# EAGLE board psg-basic-x4 (EAGLE 6.6.0)
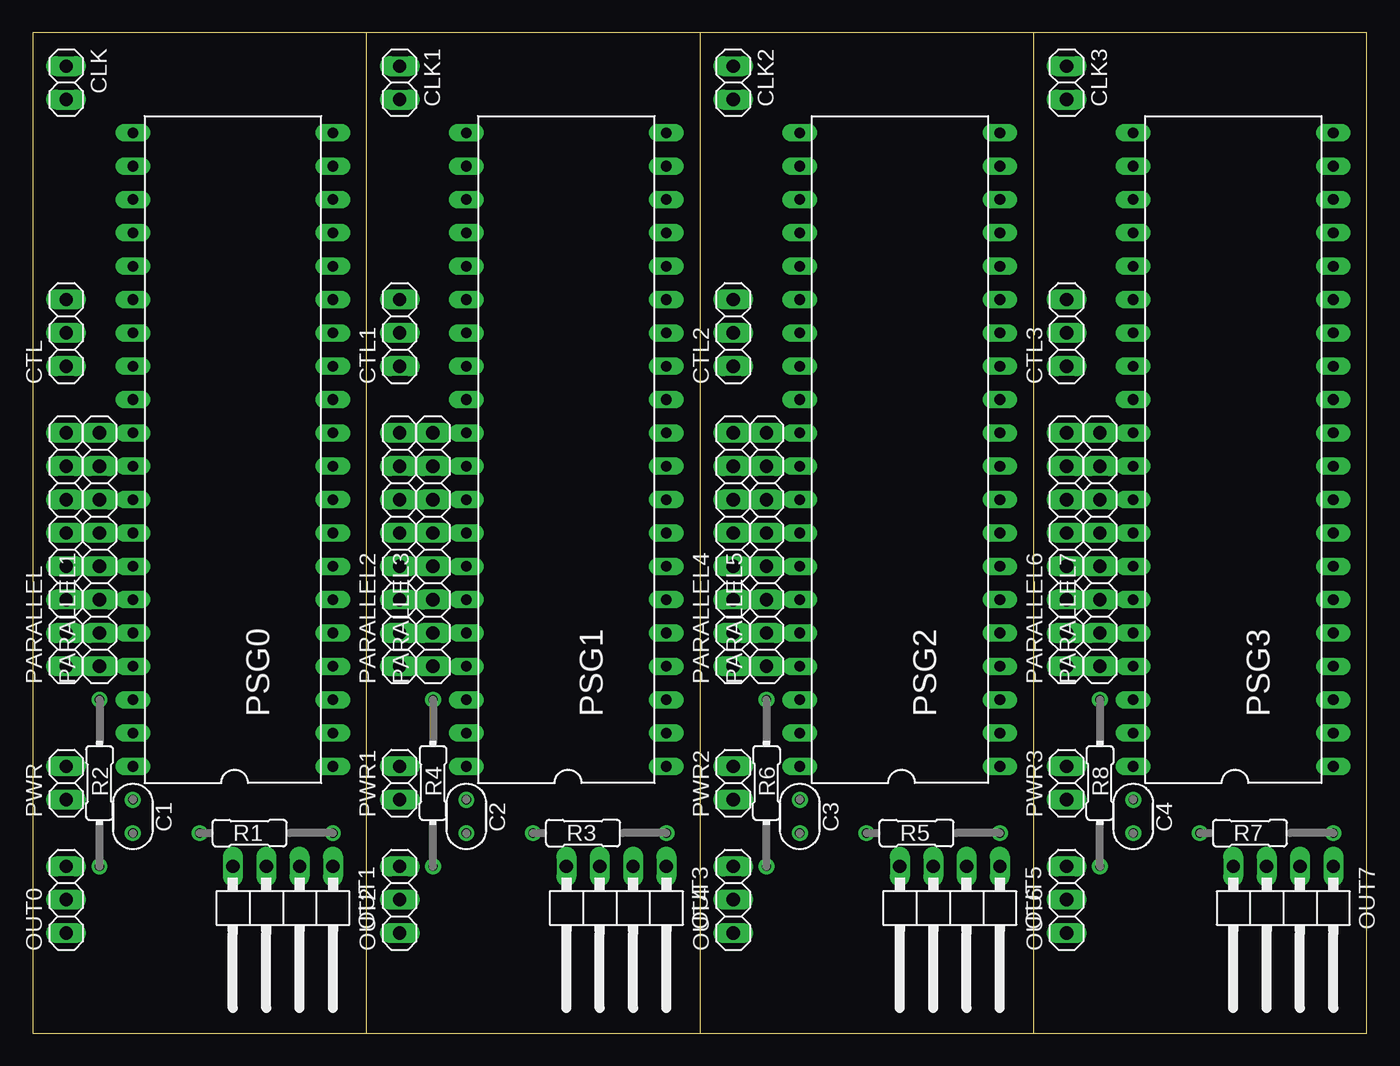
[diagram p0: board, top side]
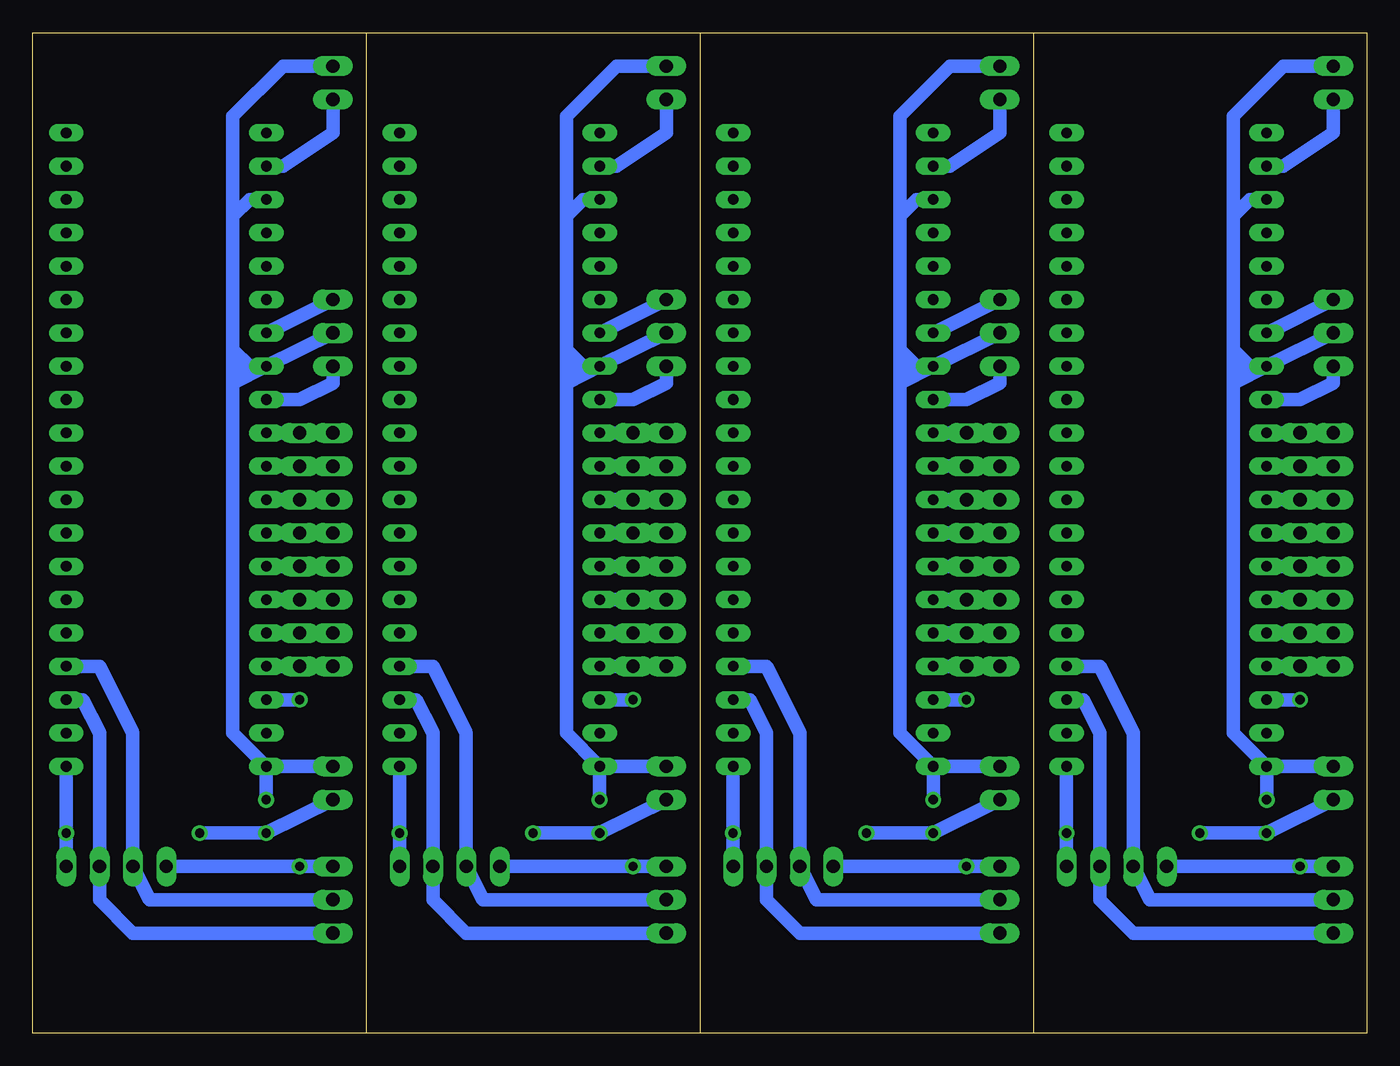
[diagram p1: board, bottom side, seen from below]

Size 101.6 x 76.2 mm. Coordinates in mm from the lower left corner, seen from the top.
Outline: 25.4,0 0,0 0,76.2 25.4,76.2
Outline: 25.4,0 50.8,0
Outline: 50.8,0 76.2,0
Outline: 76.2,0 101.6,0 101.6,76.2 76.2,76.2
Outline: 76.2,76.2 50.8,76.2
Outline: 50.8,76.2 25.4,76.2
Outline: 25.4,76.2 25.4,0
Outline: 50.8,76.2 50.8,0
Outline: 76.2,76.2 76.2,0
Copper layers (1*16): Top 0.035mm / dielectric 1.5mm / Bottom 0.035mm
Design rules "default": minimum track width 10mil, minimum drill 24mil, track to track 8mil, track to pad 8mil, pad to pad 8mil, via to via 8mil, smd to smd 8mil, copper to edge 40mil, drill to drill 8mil, minimum pad ring 10mil, minimum via ring 8mil, stop-mask expansion 4mil, vias tented up to drill 0mil, thermal gap 10mil

## Footprints (pad centres in the part's own frame; a part is rotated, then mirrored left to right if it is on the bottom)
050X030_025 = drill 0.7: 1 -1.27,0; 2 1.27,0
1X02 = drill 1.016 long: 1 -1.27,0; 2 1.27,0
1X03 = drill 1.016 long: 1 -2.54,0; 2 0,0; 3 2.54,0
1X04/90 = drill 1.016 long: 1 -3.81,-3.81; 2 -1.27,-3.81; 3 1.27,-3.81; 4 3.81,-3.81
1X08 = drill 1.016 long: 1 -8.89,0; 2 -6.35,0; 3 -3.81,0; 4 -1.27,0; 5 1.27,0; 6 3.81,0; 7 6.35,0; 8 8.89,0
DIL40 = drill 0.813 long: 1 -24.13,-7.62; 2 -21.59,-7.62; 3 -19.05,-7.62; 4 -16.51,-7.62; 5 -13.97,-7.62; 6 -11.43,-7.62; 7 -8.89,-7.62; 8 -6.35,-7.62; 9 -3.81,-7.62; 10 -1.27,-7.62; 11 1.27,-7.62; 12 3.81,-7.62; 13 6.35,-7.62; 14 8.89,-7.62; 15 11.43,-7.62; 16 13.97,-7.62; 17 16.51,-7.62; 18 19.05,-7.62; 19 21.59,-7.62; 20 24.13,-7.62; 21 24.13,7.62; 22 21.59,7.62; 23 19.05,7.62; 24 16.51,7.62; 25 13.97,7.62; 26 11.43,7.62; 27 8.89,7.62; 28 6.35,7.62; 29 3.81,7.62; 30 1.27,7.62; 31 -1.27,7.62; 32 -3.81,7.62; 33 -6.35,7.62; 34 -8.89,7.62; 35 -11.43,7.62; 36 -13.97,7.62; 37 -16.51,7.62; 38 -19.05,7.62; 39 -21.59,7.62; 40 -24.13,7.62
R0207/4A = drill 0.7: 1 -3.81,0; 2 6.35,0
R0207/5 = drill 0.7: 1 -6.35,0; 2 6.35,0

## Placement (x,y rotation side)
C1  100n  [050X030_025]  7.62,16.51 270 top
C2  100n  [050X030_025]  33.02,16.51 270 top
C3  100n  [050X030_025]  58.42,16.51 270 top
C4  100n  [050X030_025]  83.82,16.51 270 top
CLK  [1X02]  2.54,72.39 270 top
CLK1  [1X02]  27.94,72.39 270 top
CLK2  [1X02]  53.34,72.39 270 top
CLK3  [1X02]  78.74,72.39 270 top
CTL  [1X03]  2.54,53.34 90 top
CTL1  [1X03]  27.94,53.34 90 top
CTL2  [1X03]  53.34,53.34 90 top
CTL3  [1X03]  78.74,53.34 90 top
OUT0  [1X03]  2.54,10.16 90 top
OUT1  [1X04/90]  19.05,8.89 180 top
OUT2  [1X03]  27.94,10.16 90 top
OUT3  [1X04/90]  44.45,8.89 180 top
OUT4  [1X03]  53.34,10.16 90 top
OUT5  [1X04/90]  69.85,8.89 180 top
OUT6  [1X03]  78.74,10.16 90 top
OUT7  [1X04/90]  95.25,8.89 180 top
PARALLEL  [1X08]  2.54,36.83 90 top
PARALLEL1  [1X08]  5.08,36.83 90 top
PARALLEL2  [1X08]  27.94,36.83 90 top
PARALLEL3  [1X08]  30.48,36.83 90 top
PARALLEL4  [1X08]  53.34,36.83 90 top
PARALLEL5  [1X08]  55.88,36.83 90 top
PARALLEL6  [1X08]  78.74,36.83 90 top
PARALLEL7  [1X08]  81.28,36.83 90 top
PSG0  [DIL40]  15.24,44.45 90 top
PSG1  [DIL40]  40.64,44.45 90 top
PSG2  [DIL40]  66.04,44.45 90 top
PSG3  [DIL40]  91.44,44.45 90 top
PWR  [1X02]  2.54,19.05 90 top
PWR1  [1X02]  27.94,19.05 90 top
PWR2  [1X02]  53.34,19.05 90 top
PWR3  [1X02]  78.74,19.05 90 top
R1  [R0207/4A]  16.51,15.24 0 top
R2  [R0207/5]  5.08,19.05 270 top
R3  [R0207/4A]  41.91,15.24 0 top
R4  [R0207/5]  30.48,19.05 270 top
R5  [R0207/4A]  67.31,15.24 0 top
R6  [R0207/5]  55.88,19.05 270 top
R7  [R0207/4A]  92.71,15.24 0 top
R8  [R0207/5]  81.28,19.05 270 top

## Library data of the parts
C1-C4 = gm-caps-ceramic
CLK CLK1-CLK3 CTL CTL1-CTL3 OUT0 OUT1-OUT7 PARALLEL PARALLEL1-PARALLEL7 PWR PWR1-PWR3 = pinhead
PSG0 PSG1-PSG3 = 8Bit_Parts
R1-R8 = gm-resistors

## Nets
+5V: C1.1 CLK.1 CTL.2 PSG0.23 PSG0.28 PSG0.40 PWR.2
+5V1: C2.1 CLK1.1 CTL1.2 PSG1.23 PSG1.28 PSG1.40 PWR1.2
+5V2: C3.1 CLK2.1 CTL2.2 PSG2.23 PSG2.28 PSG2.40 PWR2.2
+5V3: C4.1 CLK3.1 CTL3.2 PSG3.23 PSG3.28 PSG3.40 PWR3.2
BC1: CTL.1 PSG0.29
BC2: CTL1.1 PSG1.29
BC3: CTL2.1 PSG2.29
BC4: CTL3.1 PSG3.29
BCDIR: CTL.3 PSG0.27
BCDIR1: CTL1.3 PSG1.27
BCDIR2: CTL2.3 PSG2.27
BCDIR3: CTL3.3 PSG3.27
DA0: PARALLEL1.1 PARALLEL.1 PSG0.37
DA1: PARALLEL1.2 PARALLEL.2 PSG0.36
DA2: PARALLEL1.3 PARALLEL.3 PSG0.35
DA3: PARALLEL1.4 PARALLEL.4 PSG0.34
DA4: PARALLEL1.5 PARALLEL.5 PSG0.33
DA5: PARALLEL1.6 PARALLEL.6 PSG0.32
DA6: PARALLEL1.7 PARALLEL.7 PSG0.31
DA7: PARALLEL1.8 PARALLEL.8 PSG0.30
DA8: PARALLEL2.8 PARALLEL3.8 PSG1.30
DA9: PARALLEL2.7 PARALLEL3.7 PSG1.31
DA10: PARALLEL2.6 PARALLEL3.6 PSG1.32
DA11: PARALLEL2.5 PARALLEL3.5 PSG1.33
DA12: PARALLEL2.4 PARALLEL3.4 PSG1.34
DA13: PARALLEL2.3 PARALLEL3.3 PSG1.35
DA14: PARALLEL2.2 PARALLEL3.2 PSG1.36
DA15: PARALLEL2.1 PARALLEL3.1 PSG1.37
DA16: PARALLEL4.8 PARALLEL5.8 PSG2.30
DA17: PARALLEL4.7 PARALLEL5.7 PSG2.31
DA18: PARALLEL4.6 PARALLEL5.6 PSG2.32
DA19: PARALLEL4.5 PARALLEL5.5 PSG2.33
DA20: PARALLEL4.4 PARALLEL5.4 PSG2.34
DA21: PARALLEL4.3 PARALLEL5.3 PSG2.35
DA22: PARALLEL4.2 PARALLEL5.2 PSG2.36
DA23: PARALLEL4.1 PARALLEL5.1 PSG2.37
DA24: PARALLEL6.8 PARALLEL7.8 PSG3.30
DA25: PARALLEL6.7 PARALLEL7.7 PSG3.31
DA26: PARALLEL6.6 PARALLEL7.6 PSG3.32
DA27: PARALLEL6.5 PARALLEL7.5 PSG3.33
DA28: PARALLEL6.4 PARALLEL7.4 PSG3.34
DA29: PARALLEL6.3 PARALLEL7.3 PSG3.35
DA30: PARALLEL6.2 PARALLEL7.2 PSG3.36
DA31: PARALLEL6.1 PARALLEL7.1 PSG3.37
GND: C1.2 PWR.1 R1.1
GND1: C2.2 PWR1.1 R3.1
GND2: C3.2 PWR2.1 R5.1
GND3: C4.2 PWR3.1 R7.1
N$1: CLK1.2 PSG1.22
N$2: OUT2.3 OUT3.4 R4.2
N$3: PSG0.38 R2.1
N$4: OUT0.3 OUT1.4 R2.2
N$5: CLK.2 PSG0.22
N$6: OUT0.2 OUT1.3 PSG0.4
N$7: OUT0.1 OUT1.2 PSG0.3
N$8: OUT1.1 PSG0.1 R1.2
N$9: OUT2.2 OUT3.3 PSG1.4
N$10: OUT2.1 OUT3.2 PSG1.3
N$11: OUT3.1 PSG1.1 R3.2
N$12: PSG1.38 R4.1
N$13: CLK2.2 PSG2.22
N$14: OUT4.3 OUT5.4 R6.2
N$15: OUT4.2 OUT5.3 PSG2.4
N$16: OUT4.1 OUT5.2 PSG2.3
N$17: OUT5.1 PSG2.1 R5.2
N$18: PSG2.38 R6.1
N$19: CLK3.2 PSG3.22
N$20: OUT6.3 OUT7.4 R8.2
N$21: OUT6.2 OUT7.3 PSG3.4
N$22: OUT6.1 OUT7.2 PSG3.3
N$23: OUT7.1 PSG3.1 R7.2
N$24: PSG3.38 R8.1

## Tracks (layer width: path | path; a pad name or v marks a point on that pad's centre or on a via)
+5V
  Bottom 1.016: 10.16,62.23 10.16,52.07 | 10.16,52.07 8.89,50.8 PSG0.28 | 10.16,52.07 10.16,50.8 | 10.16,49.53 10.16,22.86 PSG0.40 | PWR.2 PSG0.40 | PSG0.40 C1.1 | PSG0.28 10.16,50.8 | 10.16,50.8 10.16,49.53 | 10.16,49.53 PSG0.28 | PSG0.28 CTL.2 | PSG0.23 8.89,63.5 10.16,62.23 | 10.16,62.23 10.16,69.85 6.35,73.66 CLK.1
+5V1
  Bottom 1.016: 35.56,62.23 35.56,52.07 | 35.56,52.07 34.29,50.8 PSG1.28 | 35.56,52.07 35.56,50.8 | 35.56,49.53 35.56,22.86 PSG1.40 | PWR1.2 PSG1.40 | PSG1.40 C2.1 | PSG1.28 35.56,50.8 | 35.56,50.8 35.56,49.53 | 35.56,49.53 PSG1.28 | PSG1.28 CTL1.2 | PSG1.23 34.29,63.5 35.56,62.23 | 35.56,62.23 35.56,69.85 31.75,73.66 CLK1.1
+5V2
  Bottom 1.016: 60.96,62.23 60.96,52.07 | 60.96,52.07 59.69,50.8 PSG2.28 | 60.96,52.07 60.96,50.8 | 60.96,49.53 60.96,22.86 PSG2.40 | PWR2.2 PSG2.40 | PSG2.40 C3.1 | PSG2.28 60.96,50.8 | 60.96,50.8 60.96,49.53 | 60.96,49.53 PSG2.28 | PSG2.28 CTL2.2 | PSG2.23 59.69,63.5 60.96,62.23 | 60.96,62.23 60.96,69.85 57.15,73.66 CLK2.1
+5V3
  Bottom 1.016: 86.36,62.23 86.36,52.07 | 86.36,52.07 85.09,50.8 PSG3.28 | 86.36,52.07 86.36,50.8 | 86.36,49.53 86.36,22.86 PSG3.40 | PWR3.2 PSG3.40 | PSG3.40 C4.1 | PSG3.28 86.36,50.8 | 86.36,50.8 86.36,49.53 | 86.36,49.53 PSG3.28 | PSG3.28 CTL3.2 | PSG3.23 85.09,63.5 86.36,62.23 | 86.36,62.23 86.36,69.85 82.55,73.66 CLK3.1
BC1
  Bottom 1.016: PSG0.29 5.08,48.26 2.54,49.53 CTL.1
BC2
  Bottom 1.016: PSG1.29 30.48,48.26 27.94,49.53 CTL1.1
BC3
  Bottom 1.016: PSG2.29 55.88,48.26 53.34,49.53 CTL2.1
BC4
  Bottom 1.016: PSG3.29 81.28,48.26 78.74,49.53 CTL3.1
BCDIR
  Bottom 1.016: CTL.3 PSG0.27
BCDIR1
  Bottom 1.016: CTL1.3 PSG1.27
BCDIR2
  Bottom 1.016: CTL2.3 PSG2.27
BCDIR3
  Bottom 1.016: CTL3.3 PSG3.27
DA0
  Bottom 1.016: PARALLEL.1 PARALLEL1.1 PSG0.37
DA1
  Bottom 1.016: PARALLEL.2 PARALLEL1.2 PSG0.36
DA2
  Bottom 1.016: PARALLEL.3 PARALLEL1.3 PSG0.35
DA3
  Bottom 1.016: PARALLEL.4 PARALLEL1.4 PSG0.34
DA4
  Bottom 1.016: PARALLEL.5 PARALLEL1.5 PSG0.33
DA5
  Bottom 1.016: PARALLEL.6 PARALLEL1.6 PSG0.32
DA6
  Bottom 1.016: PARALLEL.7 PARALLEL1.7 PSG0.31
DA7
  Bottom 1.016: PARALLEL.8 PARALLEL1.8 PSG0.30
DA8
  Bottom 1.016: PARALLEL2.8 PARALLEL3.8 PSG1.30
DA9
  Bottom 1.016: PARALLEL2.7 PARALLEL3.7 PSG1.31
DA10
  Bottom 1.016: PARALLEL2.6 PARALLEL3.6 PSG1.32
DA11
  Bottom 1.016: PARALLEL2.5 PARALLEL3.5 PSG1.33
DA12
  Bottom 1.016: PARALLEL2.4 PARALLEL3.4 PSG1.34
DA13
  Bottom 1.016: PARALLEL2.3 PARALLEL3.3 PSG1.35
DA14
  Bottom 1.016: PARALLEL2.2 PARALLEL3.2 PSG1.36
DA15
  Bottom 1.016: PARALLEL2.1 PARALLEL3.1 PSG1.37
DA16
  Bottom 1.016: PARALLEL4.8 PARALLEL5.8 PSG2.30
DA17
  Bottom 1.016: PARALLEL4.7 PARALLEL5.7 PSG2.31
DA18
  Bottom 1.016: PARALLEL4.6 PARALLEL5.6 PSG2.32
DA19
  Bottom 1.016: PARALLEL4.5 PARALLEL5.5 PSG2.33
DA20
  Bottom 1.016: PARALLEL4.4 PARALLEL5.4 PSG2.34
DA21
  Bottom 1.016: PARALLEL4.3 PARALLEL5.3 PSG2.35
DA22
  Bottom 1.016: PARALLEL4.2 PARALLEL5.2 PSG2.36
DA23
  Bottom 1.016: PARALLEL4.1 PARALLEL5.1 PSG2.37
DA24
  Bottom 1.016: PARALLEL6.8 PARALLEL7.8 PSG3.30
DA25
  Bottom 1.016: PARALLEL6.7 PARALLEL7.7 PSG3.31
DA26
  Bottom 1.016: PARALLEL6.6 PARALLEL7.6 PSG3.32
DA27
  Bottom 1.016: PARALLEL6.5 PARALLEL7.5 PSG3.33
DA28
  Bottom 1.016: PARALLEL6.4 PARALLEL7.4 PSG3.34
DA29
  Bottom 1.016: PARALLEL6.3 PARALLEL7.3 PSG3.35
DA30
  Bottom 1.016: PARALLEL6.2 PARALLEL7.2 PSG3.36
DA31
  Bottom 1.016: PARALLEL6.1 PARALLEL7.1 PSG3.37
GND
  Bottom 1.016: C1.2 R1.1 | PWR.1 C1.2 | 8.89,15.24 C1.2
GND1
  Bottom 1.016: C2.2 R3.1 | PWR1.1 C2.2 | 34.29,15.24 C2.2
GND2
  Bottom 1.016: C3.2 R5.1 | PWR2.1 C3.2 | 59.69,15.24 C3.2
GND3
  Bottom 1.016: C4.2 R7.1 | PWR3.1 C4.2 | 85.09,15.24 C4.2
N$1
  Bottom 1.016: CLK1.2 27.94,68.58 31.75,66.04 PSG1.22
N$2
  Bottom 1.016: OUT2.3 R4.2 OUT3.4
N$3
  Bottom 1.016: R2.1 PSG0.38
N$4
  Bottom 1.016: OUT0.3 R2.2 OUT1.4
N$5
  Bottom 1.016: CLK.2 2.54,68.58 6.35,66.04 PSG0.22
N$6
  Bottom 1.016: PSG0.4 20.32,27.94 17.78,22.86 OUT1.3 16.51,10.16 OUT0.2
N$7
  Bottom 1.016: PSG0.3 21.59,25.4 20.32,22.86 OUT1.2 20.32,10.16 17.78,7.62 OUT0.1
N$8
  Bottom 1.016: PSG0.1 R1.2 OUT1.1
N$9
  Bottom 1.016: PSG1.4 45.72,27.94 43.18,22.86 OUT3.3 41.91,10.16 OUT2.2
N$10
  Bottom 1.016: PSG1.3 46.99,25.4 45.72,22.86 OUT3.2 45.72,10.16 43.18,7.62 OUT2.1
N$11
  Bottom 1.016: PSG1.1 R3.2 OUT3.1
N$12
  Bottom 1.016: R4.1 PSG1.38
N$13
  Bottom 1.016: CLK2.2 53.34,68.58 57.15,66.04 PSG2.22
N$14
  Bottom 1.016: OUT4.3 R6.2 OUT5.4
N$15
  Bottom 1.016: PSG2.4 71.12,27.94 68.58,22.86 OUT5.3 67.31,10.16 OUT4.2
N$16
  Bottom 1.016: PSG2.3 72.39,25.4 71.12,22.86 OUT5.2 71.12,10.16 68.58,7.62 OUT4.1
N$17
  Bottom 1.016: PSG2.1 R5.2 OUT5.1
N$18
  Bottom 1.016: R6.1 PSG2.38
N$19
  Bottom 1.016: CLK3.2 78.74,68.58 82.55,66.04 PSG3.22
N$20
  Bottom 1.016: OUT6.3 R8.2 OUT7.4
N$21
  Bottom 1.016: PSG3.4 96.52,27.94 93.98,22.86 OUT7.3 92.71,10.16 OUT6.2
N$22
  Bottom 1.016: PSG3.3 97.79,25.4 96.52,22.86 OUT7.2 96.52,10.16 93.98,7.62 OUT6.1
N$23
  Bottom 1.016: PSG3.1 R7.2 OUT7.1
N$24
  Bottom 1.016: R8.1 PSG3.38